# Allegro board hdk-2_0-usb-pvt-0526.brd
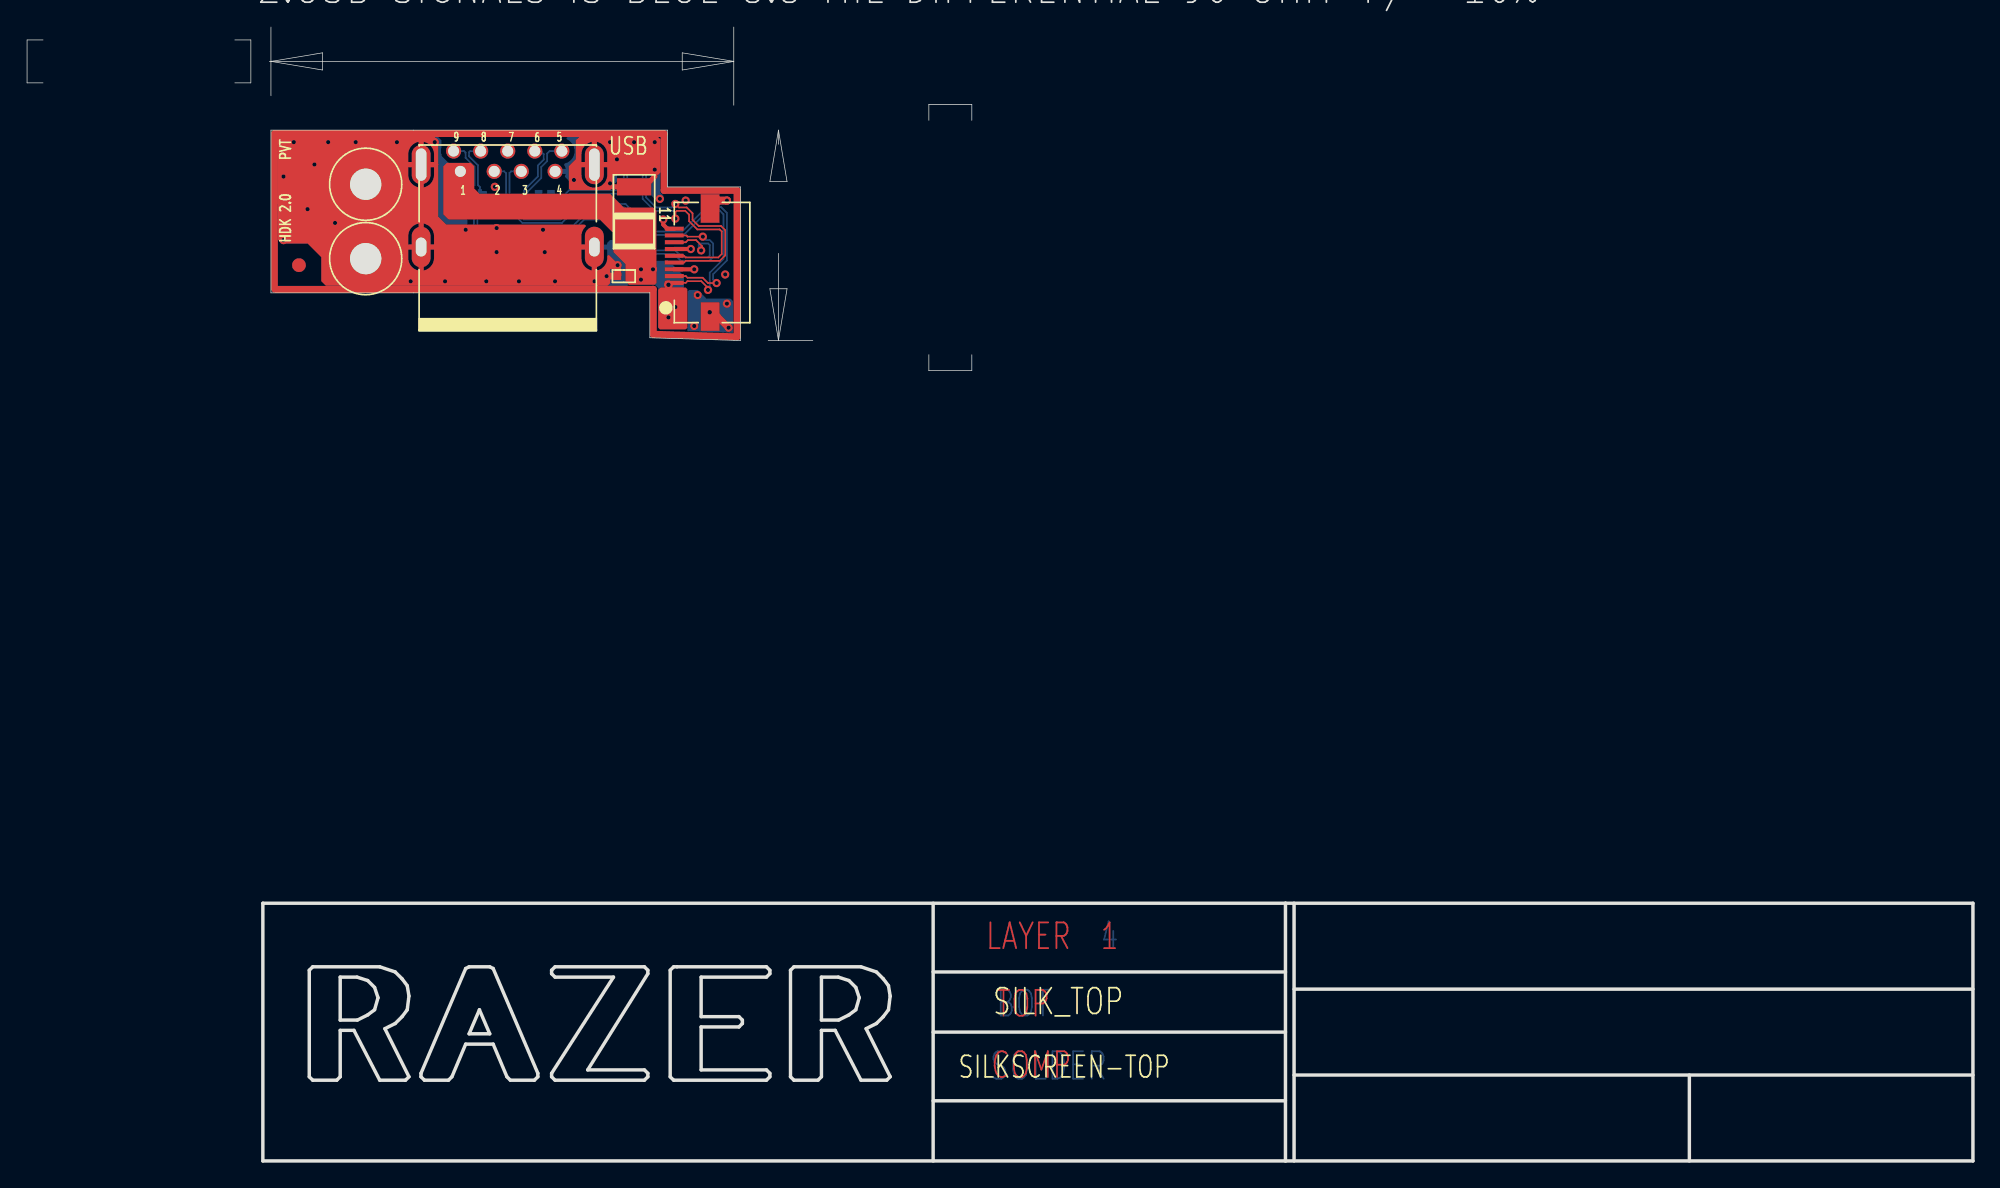
[diagram p0: board, top side]
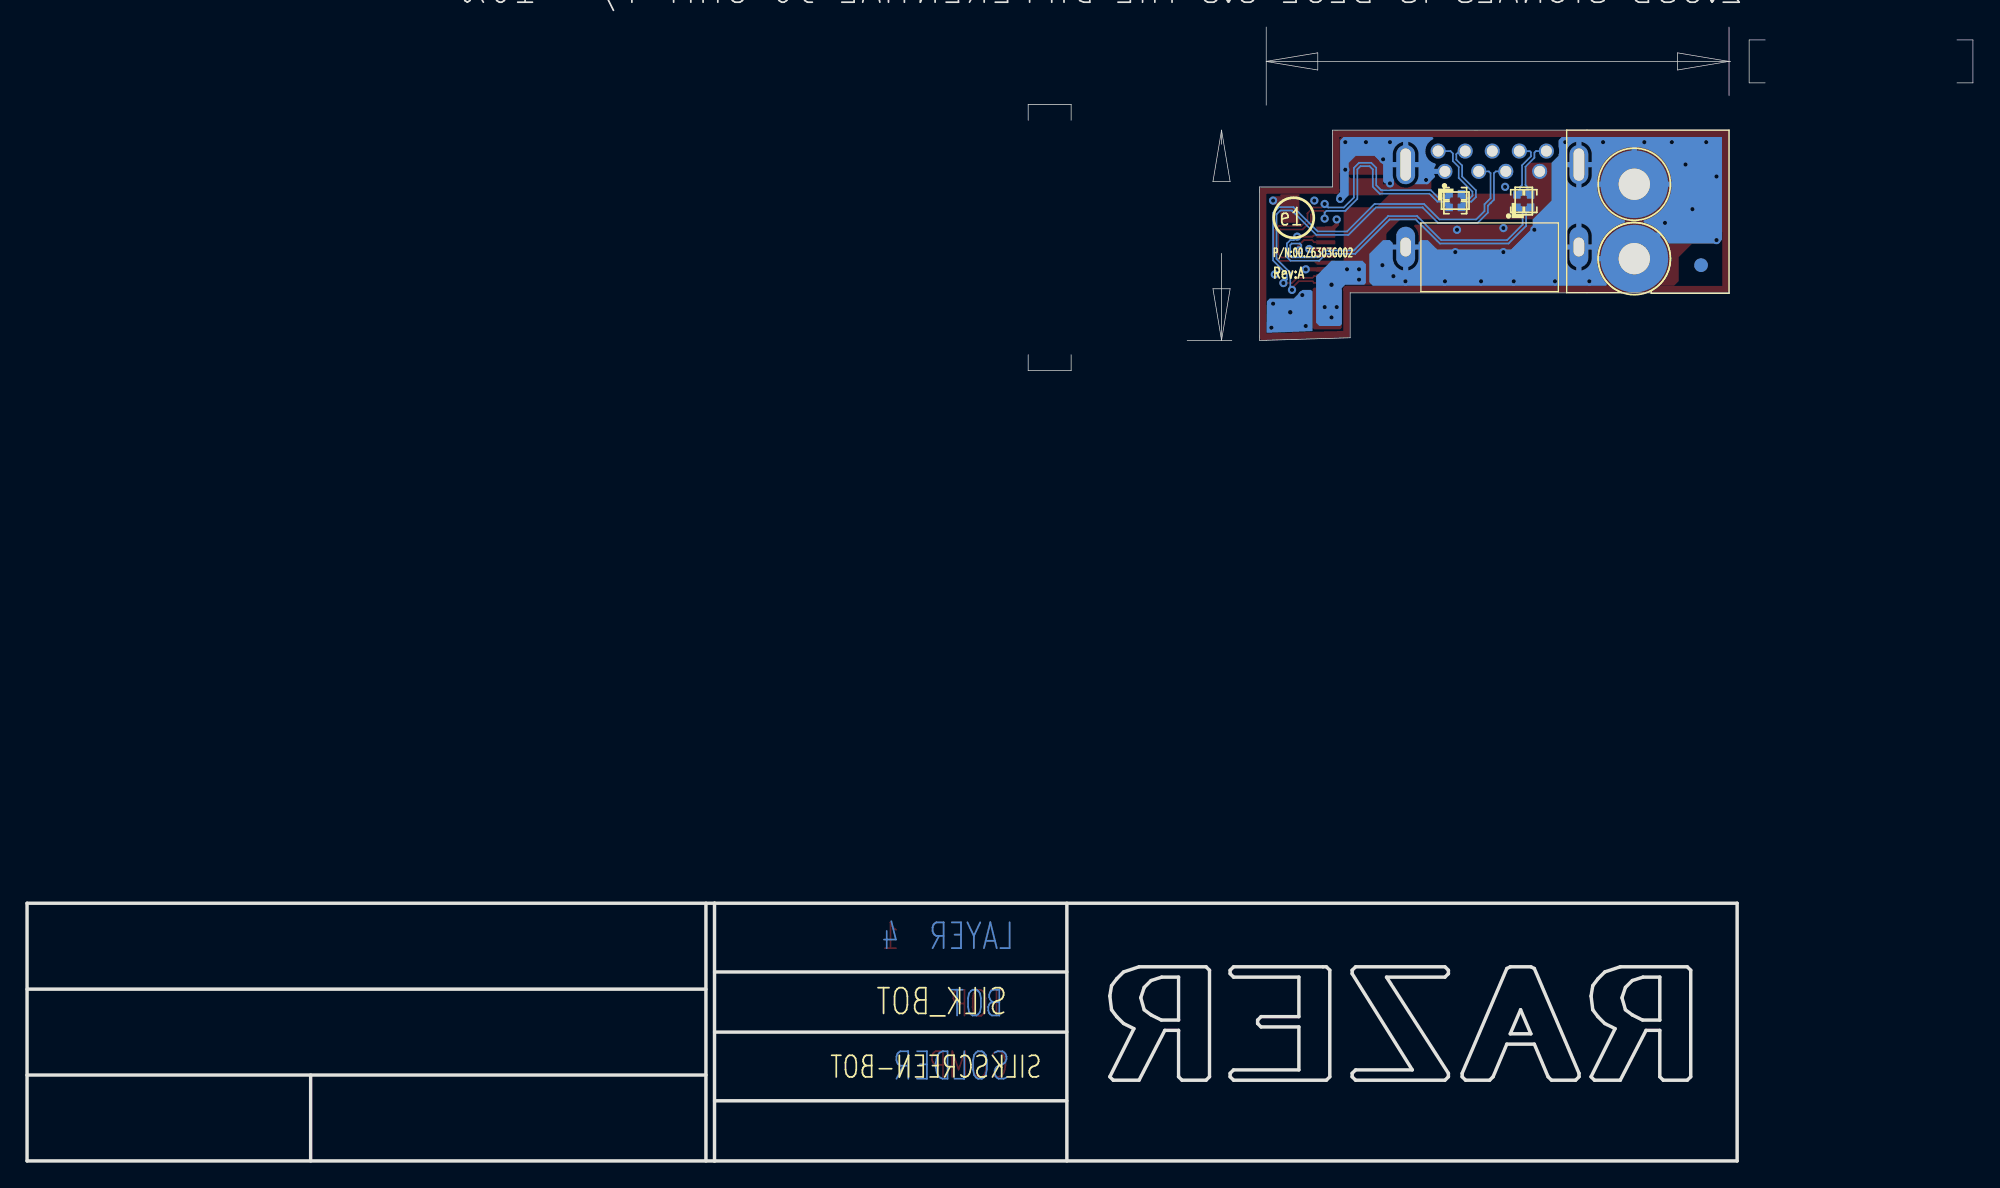
[diagram p1: board, bottom side, seen from below]

Outline 143.79 x 83.82 mm; copper layers: TOP, IN1, IN2, BOTTOM. Coordinates in mm from the lower left corner of the outline.
Outline path: 18.02,76.2 18.02,64.17 46.02,64.17 46.02,60.85 52.22,60.66 52.72,60.66 52.72,72 47.32,72 47.32,76.2 18.02,76.2

## Design rules (mm)
net group DIFFPAIR34: nets SSRX+_R SSRX-_R
net group DIFFPAIR35: nets SSRX+ SSRX-
net group DIFFPAIR36: nets SSTX+_R SSTX-_R
net group DIFFPAIR37: nets SSTX+ SSTX-
net group DIFFPAIR38: nets D+ D-

## Placement (name value [footprint] x y rotation side)
C1000  6TPE220MAZB  [TANB]  44.86 70.36 90 top
C1001  470pF_X7R_50V  [C0402]  44.09 65.41 180 top
CN100  -  [SINGATRON_2UB4006-400101F]  35.52 64.35 0 top
J101  JS-1191PSDR-XX-A  [CHYAO_JS-1191PSDR-11]  47.82 66.41 90 top
L1000  X_80_100MHz  [DLP11T]  38.25 70.99 180 bottom
L1001  X_80_100MHz  [DLP11T]  33.19 70.96 90 bottom
MT1001  MOUNTING HOLE  [HOLEC197D91]  25.02 72.2 90 top
MT1002  MOUNTING HOLE  [HOLEC197D91]  25.02 66.7 90 top
NOREF  -  []  52.22 60.66 90 top
NOREF#2  -  [unnamed#2]  20.09 66.22 0 top
NOREF#3  -  []  17.42 0 0 top
NOREF#4  -  []  18.02 76.2 0 top
NOREF#5  -  [unnamed#2]  20.09 66.22 180 bottom
R1000  0  [R0402]  38.25 71.5 0 bottom
R1001  0  [R0402]  38.25 70.48 0 bottom
R1002  0  [R0402]  33.7 70.96 270 bottom
R1003  0  [R0402]  32.68 70.96 270 bottom

## Library data of the parts
C1000 = C_D_KO CAP 150U M 6_0.3V
C1001 = C_MMLC_0
CN100 = CONN9,USB3,UEA111JC-RA4U4-7H_0
J101 = CON2_5
L1000 L1001 = INDCT,ComMod,USB3,80_100MHz
MT1001 MT1002 = MOUNTING HOLE
R1000-R1003 = R: room: 14

## Footprints (pads in the part's own frame, mm; a bottom-side part is the same pattern mirrored in y, then rotated)
C0402
  rect 0.559x0.559 smd: 1(-0.457,0) 2(0.457,0)
CHYAO_JS-1191PSDR-11
  rect 0.305x1.397 smd: 1(-2.5,0) 2(-2,0) 3(-1.5,0) 4(-1,0) 5(-0.5,0) 6(0,0) 7(0.5,0) 8(1,0) 9(1.5,0) 10(2,0) 11(2.5,0)
  rect 2.108x1.397 smd: S1(3.998,-2.65) S2(-3.998,-2.65)
DLP11T
  rect 0.508x0.305 smd: 1(-0.625,0.275) 2(0.625,0.275) 3(0.625,-0.275) 4(-0.625,-0.275)
HOLEC197D91
  round 5.004 hole 2.311: 1(0,0)
R0402
  rect 0.559x0.559 smd: 1(-0.457,0) 2(0.457,0)
SINGATRON_2UB4006-400101F
  round 1.118 hole 0.813: 1(-3.5,8.8) 2(-1,8.8) 3(1,8.8) 4(3.5,8.8) 5(4,10.3) 6(2,10.3) 7(0,10.3) 8(-2,10.3) 9(-4,10.3)
  oval 1.397x2.896 hole 0.787x2.388: G1(-6.4,9.3) G2(6.4,9.3)
  oval 1.397x2.997 hole 0.787x1.397: G3(-6.4,3.208) G4(6.4,3.208)
TANB
  rect 1.27x2.54 smd: 1(-1.651,0) 2(1.651,0)
unnamed#2
  round 1.016 smd: 1(0,0)

## Nets
5V: C1000.1 C1001.1 CN100.1(VBUS) J101.1 J101.2
D+: CN100.3(D+) J101.4
D-: CN100.2(D-) J101.3
SSRX+: J101.7 L1000.4 R1001.2
SSRX+_R: CN100.6(SSRX+) L1000.3 R1001.1
SSRX-: J101.6 L1000.1 R1000.2
SSRX-_R: CN100.5(SSRX-) L1000.2 R1000.1
SSTX+: J101.10 L1001.4 R1003.2
SSTX+_R: CN100.9(SSTX+) L1001.3 R1003.1
SSTX-: J101.9 L1001.1 R1002.2
SSTX-_R: CN100.8(SSTX-) L1001.2 R1002.1
USB_GND: C1000.2 C1001.2 CN100.4(GND1) CN100.7(GND2) CN100.G1(GND3) CN100.G2(GND4) CN100.G3(GND5) CN100.G4(GND6) J101.5 J101.8 J101.11 J101.S1 J101.S2 MT1001.1(GND) MT1002.1(GND)

Pads without a net: NOREF#2 1; NOREF#5 1

## Via types
v1: diameter 0.61, hole 0.305, TOP to BOTTOM, 54 vias
v2: diameter 0.66, hole 0.33, TOP to BOTTOM, 2 vias

## Routing (per net, layer and track width the routed paths; a pad name or vN(x,y) marks a point on that pad's centre or on a via; arc(x,y) is an arc through that point)
5V:
  vias: v1(45.36,65.91) v1(45.36,65.15) v1(46.25,65.91) v1(47.02,63.12) v1(47.4,62.36) v1(47.9,63.12) v2(47.4,64.77)
D+: length 31.1
  TOP w0.127: J101.4 48.68,65.41 48.8,65.29 49.93,65.29 50.32,64.9 v1(50.95,64.9)
  BOTTOM w0.127: CN100.3 35.77,73.15 35.65,73.03 35.65,71.16 36.09,70.72 36.09,70.21 36.71,69.6 39.42,69.6 40.56,70.74 44.22,70.74 46.25,68.71 48.41,68.71 50.22,70.51 51.29,70.51 51.71,70.08 51.71,66.57 50.7,65.55 50.7,65.15 v1(50.95,64.9)
D-: length 31.1
  TOP w0.127: v1(50.32,64.39) 50.32,64.54 49.82,65.04 48.8,65.04 48.68,64.91 J101.3
  BOTTOM w0.127: CN100.2 35.25,73.15 35.39,73.02 35.39,71.06 35.84,70.61 35.84,70.1 36.6,69.34 39.52,69.34 40.67,70.48 44.12,70.48 46.15,68.45 48.52,68.45 50.32,70.26 51.18,70.26 51.46,69.98 51.46,66.67 50.44,65.66 50.44,64.52 v1(50.32,64.39)
SSRX+: length 24.6
  TOP w0.127: J101.7 48.54,66.91 48.67,66.79 51.08,66.79 51.33,67.04 51.33,68.71 51.18,68.86 49.53,68.86 48.92,69.47 48.92,69.95 48.64,70.23 48.01,70.23 47.9,70.13 v1(47.9,69.66)
  BOTTOM w0.127: R1001.2 38.71,70.55 L1000.4 38.99,70.72 39.19,70.92 39.57,70.92 40.16,71.5 43.83,71.5 44.35,72.02 44.35,73.3 44.58,73.53 45.26,73.53 45.49,73.3 45.49,71.12 46.38,70.23 47.78,70.23 47.9,70.1 v1(47.9,69.66)
SSRX+_R: length 5.9
  BOTTOM w0.127: R1001.1 37.8,70.55 L1000.3 37.51,70.72 37.31,70.92 37.06,70.92 36.73,71.25 36.73,71.75 37.74,72.77 37.74,73.59 38.18,74.02 38.18,74.42 37.95,74.65 CN100.6
SSRX-: length 24.6
  TOP w0.127: v1(47.9,70.74) 48.16,70.48 48.74,70.48 49.17,70.05 49.17,69.57 49.64,69.11 51.29,69.11 51.59,68.81 51.59,66.94 51.18,66.54 48.66,66.54 48.54,66.41 J101.6
  BOTTOM w0.127: v1(47.9,70.74) 47.65,70.48 46.48,70.48 45.75,71.22 45.75,73.41 45.36,73.79 44.48,73.79 44.09,73.41 44.09,72.12 43.73,71.75 40.05,71.75 39.47,71.17 39.09,71.17 38.99,71.27 L1000.1 38.71,71.44 R1000.2
SSRX-_R: length 5.9
  BOTTOM w0.127: R1000.1 37.8,71.44 L1000.2 37.51,71.27 37.42,71.17 37.16,71.17 36.98,71.35 36.98,71.65 38,72.67 38,73.48 38.43,73.91 38.43,74.47 38.61,74.65 CN100.5
SSTX+: length 26
  TOP w0.127: v1(49.94,68.33) 48.8,68.33 48.72,68.41 J101.10
  BOTTOM w0.127: v1(49.94,68.33) 50.19,68.07 50.44,68.07 50.7,67.82 50.7,66.82 50.42,66.55 48.31,66.55 47.8,67.06 45.64,67.06 43.1,69.6 41.17,69.6 39.4,67.82 34.32,67.82 33.02,69.11 33.02,70.13 32.92,70.23 L1001.4 32.75,70.5 R1003.2
SSTX+_R: length 4.5
  BOTTOM w0.127: R1003.1 32.75,71.42 L1001.3 32.92,71.99 33.06,72.14 33.06,73.5 32.4,74.16 32.4,74.54 32.29,74.65 CN100.9
SSTX-: length 26
  TOP w0.127: v1(49.81,67.31) 49.89,67.39 49.89,67.61 49.43,68.07 48.84,68.07 48.68,67.91 J101.9
  BOTTOM w0.127: v1(49.81,67.31) 49.63,67.49 49.63,67.72 49.73,67.82 50.34,67.82 50.44,67.71 50.44,66.93 50.32,66.8 48.41,66.8 47.9,67.31 45.75,67.31 43.21,69.85 41.07,69.85 39.29,68.07 34.42,68.07 33.27,69.22 33.27,70.08 33.47,70.27 L1001.1 33.63,70.5 R1002.2
SSTX-_R: length 4.5
  BOTTOM w0.127: CN100.8 33.51,74.64 32.73,74.64 32.66,74.57 32.66,74.26 33.32,73.6 33.32,72.14 33.47,71.99 L1001.2 33.63,71.42 R1002.1
USB_GND: length 163.1
  TOP w0.305: v1(47.02,69.6) 47.02,69.22 47.32,68.91 J101.11 ; J101.5 v1(49.3,65.91) ; J101.8 v1(49.05,67.41)
  TOP w0.381: CN100.G2 43,73.65 ; CN100.G2 40.84,73.65 ; CN100.G2 41.92,75.48 ; 40.84,67.56 CN100.G4 41.92,65.68 ; 29.12,71.82 CN100.G1 ; CN100.G1 29.12,75.48 ; CN100.G1 28.04,73.65 ; CN100.G1 30.2,73.65 ; CN100.G3 30.2,67.56 ; CN100.G3 29.12,69.44 ; CN100.G3 28.04,67.56 ; CN100.G3 29.12,65.68 ; v1(46.38,73.28) 46.38,72.77 45.62,72.01 43.33,72.01 v1(43.08,72.26) ; 22.14,72.2 MT1001.1 ; MT1001.1 27.91,72.2 ; MT1001.1 25.02,75.08
  TOP w0.508: v1(51.84,61.59) 51.02,62.41 J101.S2 ; v1(43.64,66.22) C1001.2 v1(42.82,65.41)
  TOP w0.61: v1(51.71,70.99) 51.06,70.99 J101.S1
  IN1 w0.381: CN100.G1 30.2,73.65 ; CN100.G1 29.12,75.48 ; CN100.G1 29.12,71.82 ; CN100.G1 28.04,73.65 ; 28.04,67.56 CN100.G3 ; CN100.G3 30.2,67.56 ; CN100.G3 29.12,65.68 ; CN100.G3 29.12,69.44 ; MT1002.1 26.94,66.7 ; MT1002.1 23.1,66.7 ; MT1002.1 25.02,68.62 ; CN100.4 39.96,73.15 ; CN100.4 39.02,72.21 ; CN100.4 38.08,73.15 ; MT1001.1 26.94,72.2 ; MT1001.1 25.02,74.12 ; MT1001.1 25.02,70.28 ; MT1001.1 23.1,72.2 ; CN100.G2 43,73.65 ; CN100.G2 41.92,71.82 ; CN100.G2 41.92,75.48 ; CN100.G2 40.84,73.65 ; CN100.G4 43,67.56 ; CN100.G4 41.92,69.44 ; CN100.G4 41.92,65.68 ; CN100.G4 40.84,67.56 ; 34.58,74.65 CN100.7 ; CN100.7 36.46,74.65 ; CN100.7 35.52,73.71 ; CN100.7 35.52,75.59
  IN2 w0.381: 41.92,71.82 CN100.G2 ; CN100.G2 40.84,73.65 ; CN100.G2 43,73.65 ; CN100.G2 41.92,75.48 ; 29.12,71.82 CN100.G1 ; CN100.G1 29.12,75.48 ; CN100.G1 30.2,73.65 ; CN100.G1 28.04,73.65 ; CN100.4 39.96,73.15 ; CN100.4 39.02,72.21 ; CN100.4 38.08,73.15 ; 28.04,67.56 CN100.G3 ; CN100.G3 29.12,65.68 ; CN100.G3 29.12,69.44 ; CN100.G3 30.2,67.56 ; MT1002.1 26.94,66.7 ; MT1002.1 23.1,66.7 ; MT1002.1 25.02,68.62 ; MT1001.1 25.02,74.12 ; MT1001.1 25.02,70.28 ; MT1001.1 23.1,72.2 ; MT1001.1 26.94,72.2 ; 35.52,73.71 CN100.7 ; CN100.7 34.58,74.65 ; CN100.7 36.46,74.65 ; CN100.7 35.52,75.59 ; CN100.G4 41.92,69.44 ; CN100.G4 43,67.56 ; CN100.G4 40.84,67.56 ; CN100.G4 41.92,65.68
  BOTTOM w0.381: 22.14,72.2 MT1001.1 ; MT1001.1 27.91,72.2 ; MT1001.1 25.02,75.08 ; 41.92,65.68 CN100.G4 ; CN100.G4 43,67.56 ; CN100.G4 40.84,67.56 ; 22.5,69.09 22.63,69.09 MT1002.1 27.91,66.7 ; CN100.G3 29.12,69.44 ; CN100.G3 30.2,67.56 ; CN100.G3 28.04,67.56 ; CN100.G3 29.12,65.68 ; 29.12,71.82 CN100.G1 ; CN100.G1 29.12,75.48 ; CN100.G1 30.2,73.65 ; CN100.G1 28.04,73.65 ; CN100.G2 41.92,75.48 ; CN100.G2 40.84,73.65 ; CN100.G2 43,73.65 ; CN100.4 39.96,73.15
  vias: v1(18.95,72.77) v1(18.95,68.07) v1(19.71,75.31) v1(20.73,70.36) v1(21.23,73.66) v1(22.25,75.31) v1(22.76,69.34) v1(24.28,75.31) v1(27.33,75.31) v1(28.35,65.02) v1(30.12,75.31) v1(30.89,65.02) v1(32.41,68.83) v1(33.93,65.02) v1(34.57,72.01) v1(34.7,68.96) v1(34.7,67.18) v1(36.35,65.02) v1(38.13,68.83) v1(38.25,67.18) v1(39.01,65.02) v1(40.41,72.52) v1(41.94,65.02) v1(43.08,75.31) v1(43.59,74.04) v1(44.86,75.31) v1(46.38,75.31) v1(46.76,71.12) v1(48.67,70.99) v1(49.3,61.72) v1(49.56,64.01) v1(51.59,65.53) v1(51.71,63.37) v2(50.44,62.74)

## Copper pours and planes (outline as drawn; the poured copper is in the pictures)
5V on TOP (solid shape): 48.79,64.44 48.79,61.59 48.67,61.47 46.76,61.47 46.63,61.59 46.63,64.39 46.81,64.57 48.67,64.57
5V on TOP (solid shape): 33.05,73.53 33.05,71.88 33.43,71.5 43.08,71.5 44.09,70.48 46.25,70.48 46.51,70.23 46.51,64.9 46.38,64.77 44.48,64.77 44.22,65.02 44.22,66.29 43.33,67.18 43.33,68.58 42.32,69.6 31.14,69.6 30.76,69.98 30.76,73.53 31.01,73.79 32.79,73.79
5V on BOTTOM (solid shape): 48.54,65.41 48.54,61.98 48.29,61.72 46.76,61.72 46.63,61.85 46.63,64.52 46.38,64.77 44.98,64.77 44.86,64.9 44.86,66.29 45.11,66.55 47.4,66.55
USB_GND on TOP (solid shape): outline of 92 points within 40.03,71.75 46.81,75.69
USB_GND on TOP (solid shape): outline of 232 points within 18.54,64.69 43.84,75.69
USB_GND on BOTTOM (solid shape): 50.19,63.75 51.97,63.75 52.17,63.55 52.2,61.67 52.2,61.22 48.79,61.34 48.79,64.26 48.92,64.39 49.56,64.39
USB_GND on BOTTOM (solid shape): 46.76,75.44 46.76,71.63 47.02,71.37 47.02,70.99 46.89,70.87 46.63,70.87 46.13,71.37 46.13,73.79 45.62,74.3 44.22,74.3 43.59,73.66 43.59,72.39 43.46,72.26 42.95,72.26 42.76,72.45 42.84,72.67 42.87,72.9 42.87,74.4 41.92,75.35 40.97,74.4 40.97,72.9 41.05,72.52 41.27,72.2 41.27,72.2 40.28,72.2 39.75,72.74 39.75,72.79 39.83,73.19 39.7,73.59 39.69,73.68 39.76,73.74 40.45,74.56 39.93,75.5 39.87,75.61 39.97,75.69 46.51,75.69
USB_GND on BOTTOM (solid shape): outline of 403 points within 18.54,64.69 44.6,75.69
USB_GND on IN1 (solid shape): outline of 1574 points within 18.57,61.21 52.1,75.69
USB_GND on IN2 (solid shape): outline of 1568 points within 18.57,61.21 52.1,75.69

## Text on the board
Ref Des/Silkscreen Bottom: P/N:00.Z6303G002 | Rev:A | e1
User.Comments: OBLONG 31X55 | OBLONG 31X94
Board Geometry/Outline: 1.Default 5MIL IS 55 OHM +/- 10% | 2.USB SIGNALS IS BLUE 5:5 MIL DIFFERENTIAL 90 OHM +/- 10% | TRACE:SPACE
Ref Des/Silkscreen Top: PVT | HDK 2.0 | USB
NCLEGEND-1-4: FIGURE | SIZE | 12.0 | 32.0 | 91.0 | DRILL CHART: TOP to BOTTOM | ALL UNITS ARE IN MILS | PLATED | QTY | 54 | 9 | 2
User.12: 0.00 | 4.20 | 9.79 | 15.54 | 12.29 | 12.00 | 29.15 | 29.30 | 29.40 | 32.45 | 34.20
User.13: 4.90 | 4.20
